# EAGLE board ELE-T301 (EAGLE 4.11)
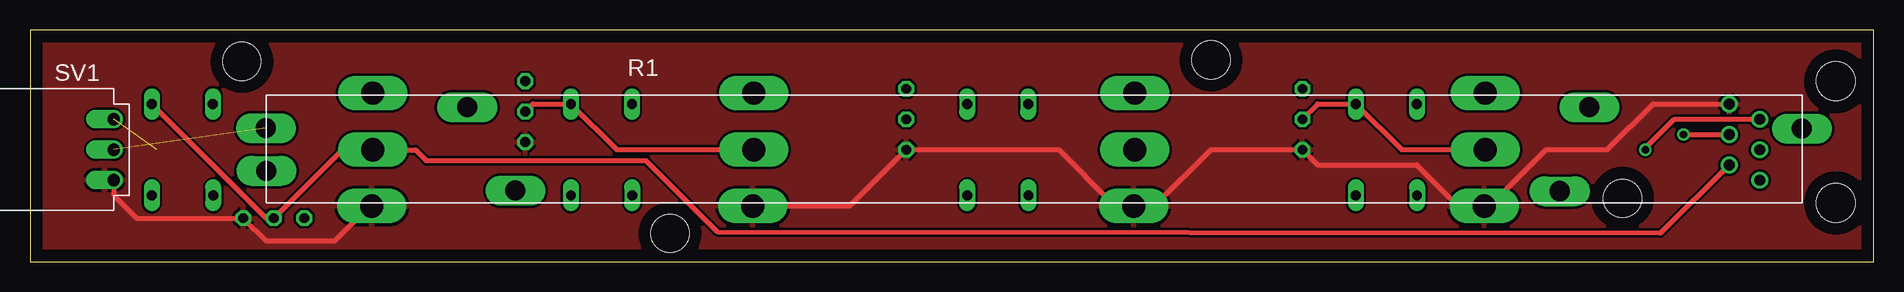
[diagram p0: board, top side]
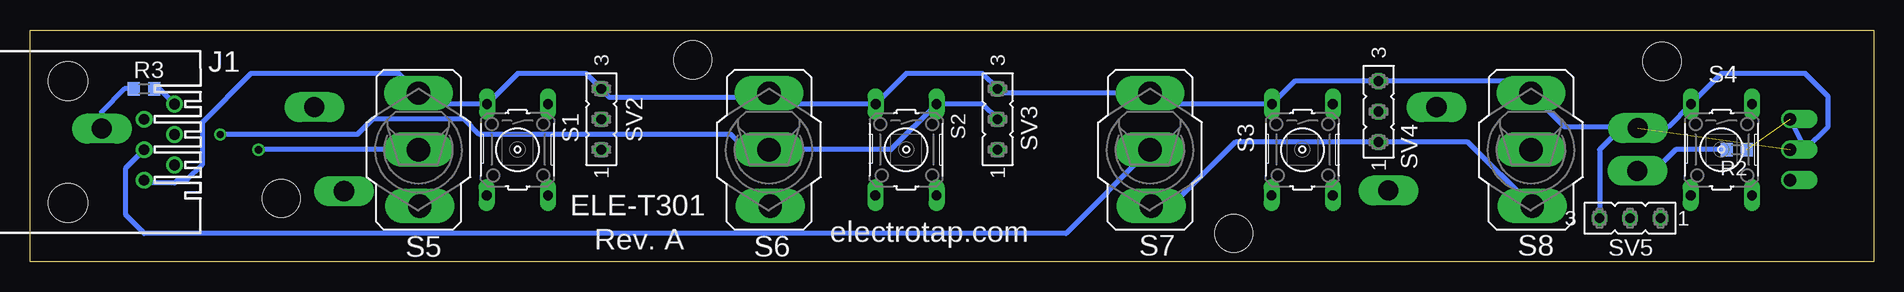
[diagram p1: board, bottom side, seen from below]

Size 153.65 x 19.36 mm. Coordinates in mm from the lower left corner, seen from the top.
Outline: 0,0 153.65,0 153.65,19.36 0,19.36 0,0
Copper layers (1*16): Top 0.035mm / dielectric 1.5mm / Bottom 0.035mm
Design rules "default": minimum track width 10mil, minimum drill 24mil, track to track 8mil, track to pad 8mil, pad to pad 8mil, via to via 8mil, smd to smd 8mil, copper to edge 40mil, drill to drill 8mil, minimum pad ring 10mil, minimum via ring 8mil, stop-mask expansion 4mil, vias tented up to drill 0mil, thermal gap 10mil
Holes 3.17 mm at 17.65,16.73 132.71,5.3 98.42,16.85 53.34,2.38

## Footprints (pad centres in the part's own frame; a part is rotated, then mirrored left to right if it is on the bottom)
TELEPHONE_JACK = drill 0.889 round: 1 -3.175,8.89; 2 -1.905,6.35; 3 -0.635,8.89; 4 0.635,6.35; 5 1.905,8.89; 6 3.175,6.35 | hole 3.251: -5.08,0; 5.08,0
SLIDER_100MM = drill 1.676 long: 1 0.02,2.68; 2 -0.02,6.25; 3 127.98,6.2; GND 16.76,8; GND$1 20.77,1.03; GND$2 107.8,0.98; GND$3 110.27,8
R0603 = smd 1 x 1.1: 1 -0.85,0; 2 0.85,0
BUTTON_KSF = drill 0.813 long: 1 -3.81,2.54; 2 3.81,2.54; 3 -3.81,-2.54; 4 3.81,-2.565
TOGGLE = drill 1.93 long: 1 -0.1,4.713; 2 0,0; 3 0,-4.713
JACK_MOLEX_3PIN_RA = drill 1.016 offset: 5V 0,0; GND 0,5.08; SENSOR 0,2.54
HEADER-FE-3X1 = drill 0.813 octagon: 1 -5.08,0; 2 -2.54,0; 3 0,0

## Placement (x,y rotation side)
J1  [TELEPHONE_JACK]  150.49,10 270 bottom
R1  10K  [SLIDER_100MM]  19.68,4.92 0 top
R2  549  [R0603]  11.43,9.36 180 bottom
R3  549  [R0603]  144.14,14.44 0 bottom
S1  [BUTTON_KSF]  113.02,9.36 270 bottom
S2  [BUTTON_KSF]  80.64,9.36 270 bottom
S3  [BUTTON_KSF]  47.62,9.36 270 bottom
S4  [BUTTON_KSF]  12.7,9.36 270 bottom
S5  [TOGGLE]  121.28,9.36 180 bottom
S6  [TOGGLE]  92.07,9.36 180 bottom
S7  [TOGGLE]  60.32,9.36 180 bottom
S8  [TOGGLE]  28.57,9.36 180 bottom
SV1  JACK_MOLEX_3PINRA_MALE  [JACK_MOLEX_3PIN_RA]  6.98,11.9 180 top
SV2  [HEADER-FE-3X1]  106.04,14.44 90 bottom
SV3  [HEADER-FE-3X1]  73.02,14.44 90 bottom
SV4  [HEADER-FE-3X1]  41.27,15.08 90 bottom
SV5  [HEADER-FE-3X1]  22.86,3.64 180 bottom

## Library data of the parts
J1 SV1-SV5 = TEABOX-LIB
R1 S1-S8 = SENSORPARTS
R2 R3 = rcl

## Nets
+5V: J1.6 R2.1 S1.3 S2.3 S3.3 S4.3 S5.3 S6.3 S7.3 S8.3 SV1.5V SV2.3 SV3.3 SV4.3 SV5.3
GND: J1.1 R3.2 S5.1 S6.1 S7.1 S8.1 SV1.GND SV2.1 SV3.1 SV4.1 SV5.1
N$2: R1.1 R2.2
N$3: R1.2 SV1.SENSOR
N$4: R1.3 R3.1
N$7: J1.3 S2.1 S6.2 SV3.2
N$8: J1.2 S1.1 S5.2 SV2.2
N$9: J1.4 S3.1 S7.2 SV4.2
N$11: J1.5 S4.1 S8.2 SV5.2

## Tracks (layer width: path | path; a pad name or v marks a point on that pad's centre or on a via)
+5V  (1 unrouted)
  Bottom 0.406: SV1.5V 5.71,9.36 3.8,11.27 3.8,13.81 5.71,15.71 12.7,15.71 S4.3 17.14,11.27 19.68,11.27 | SV5.3 22.86,9.36 20.95,11.27 19.68,11.27 | 19.68,11.27 19.66,11.25 | 19.68,11.27 25.76,11.27 S8.3 29.57,15.08 SV4.3 48.26,15.08 S3.3 59.05,13.17 60.32,14.44 S7.3 72.68,14.07 SV3.3 74.29,15.71 80.64,15.71 S2.3 91.44,13.17 92.07,13.81 S6.3 92.69,14.07 93.03,13.73 105.34,13.72 SV2.3 107.31,15.71 113.02,15.71 S1.3 120.01,13.17 121.28,14.44 S5.3 122.92,15.71 135.25,15.71 139.31,11.65 139.31,8.09 140.58,6.82 141.35,6.82 141.6,6.57 144.39,6.57 J1.6
GND
  Top 0.406: S8.1 28.57,4.75 28.57,4.92 25.39,1.74 19.68,1.74 SV5.1 8.89,3.64 6.98,5.55 SV1.GND | S7.1 68.31,4.65 SV3.1 85.72,9.36 90.16,4.92 92.07,4.92 91.97,4.81 S6.1 93.71,4.65 98.42,9.36 SV2.1 107.31,8.09 115.56,8.09 118.74,4.92 121.28,4.92 121.28,4.75 S5.1 121.65,4.65 126.36,9.36 131.44,9.36 135.25,13.17 J1.1
  Bottom 0.406: S8.1 33.82,10 SV4.1 53.21,10 58.29,4.92 60.32,4.92 60.22,4.81 S7.1 | R3.2 142.87,14.44 J1.1
  pour Top: 0.63,18.25 0.63,0.47 153.03,0.47 153.03,18.25
N$2
  Bottom 0.406: R2.2 16.5,9.36 18.41,7.46 19.68,7.46 19.7,7.47 R1.1
N$3  (1 unrouted)
N$4
  Bottom 0.406: R1.3 147.67,12.54 145.79,14.44 R3.1
N$7  (via drill 0.61)
  Top 0.406: v137.79,10.63 J1.3
  Bottom 0.406: SV3.2 74.29,13.17 S2.1 81.91,9.36 S6.2 93.97,9.36 95.24,10.63 116.2,10.63 117.47,11.9 125.09,11.9 126.36,10.63 v137.79,10.63
N$8  (via drill 0.61)
  Top 0.406: SV2.2 107.31,13.17 S1.1 114.3,9.36 S5.2 | v134.62,9.36 134.62,9.49 137.03,11.9 J1.2
  Bottom 0.406: S5.2 v134.62,9.36
N$9
  Top 0.406: SV4.2 41.91,13.17 S3.1 48.89,9.36 S7.2
  Bottom 0.406: S7.2 67.3,2.38 144.14,2.38 145.66,3.9 145.66,7.84 J1.4
N$11
  Top 0.406: S4.1 19.68,3.64 SV5.2 26.05,9.38 26.08,9.36 S8.2 28.59,9.34 32.13,9.34 33.02,8.45 51.33,8.45 57.27,2.5 135.88,2.4 J1.5

## Text on the board
bPlace: ELE-T301 | Rev. A | electrotap.com